# Altium PCB AdapterPlate.PcbDoc
Units mm, origin at the board's own origin, x right, y up, seen from the top; angles counter-clockwise.
Board outline 22 x 22 mm, 2 copper layers (Top Layer, Bottom Layer); 2 components, 13 nets, 27 pads, 0 vias.
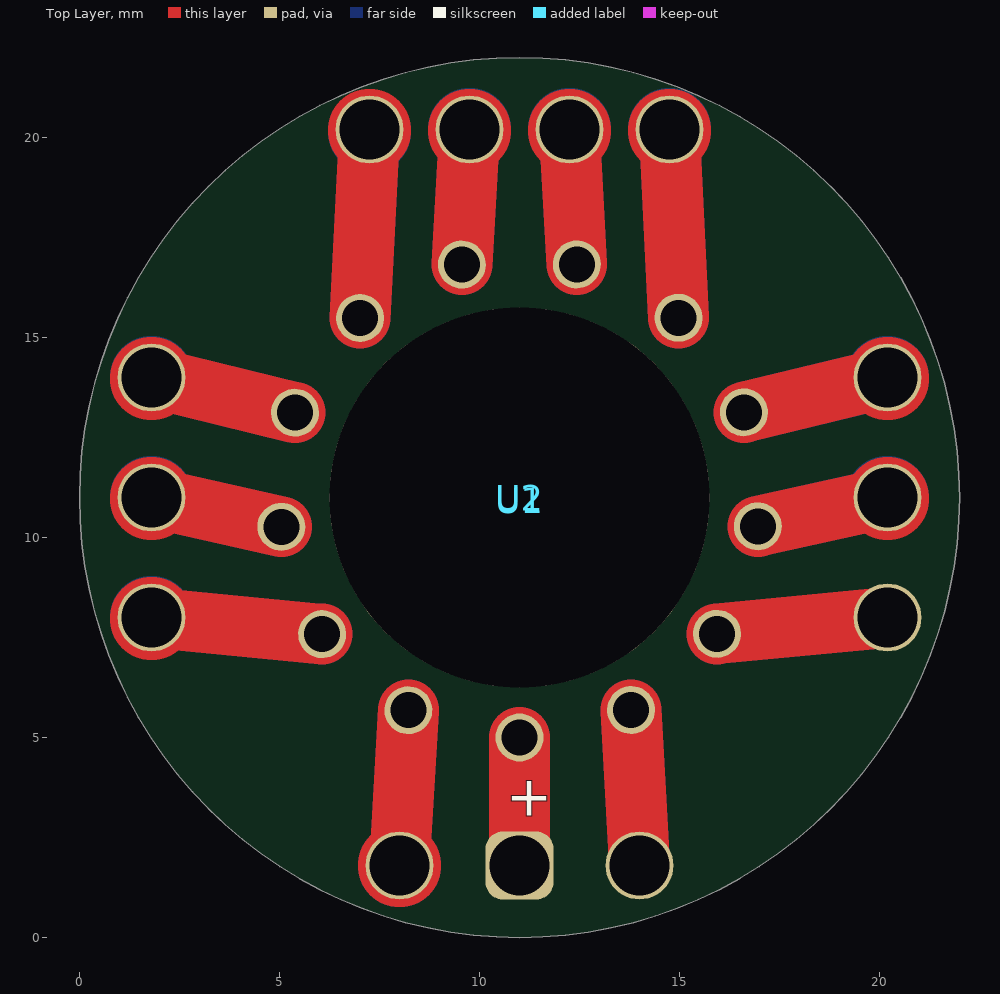
[diagram p0: Top Layer view]
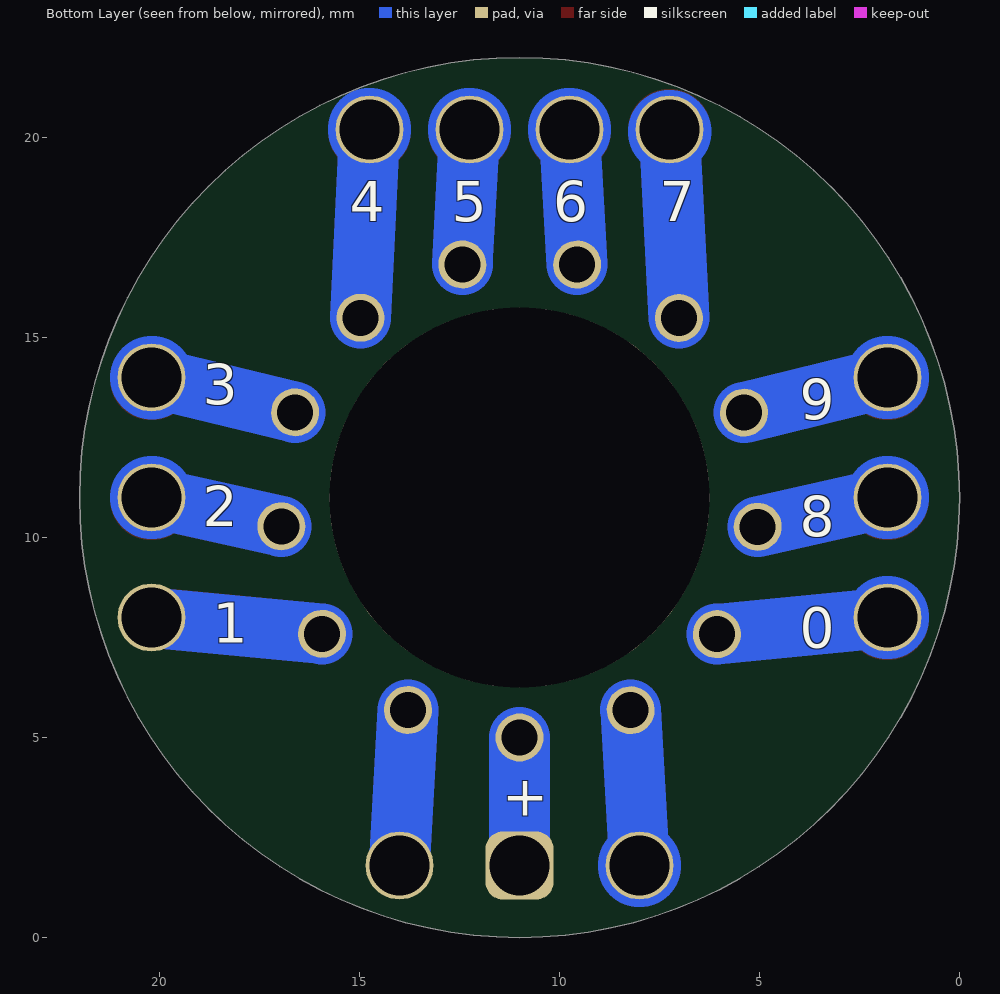
[diagram p1: Bottom Layer view, seen from below]

## Layer stack, top to bottom
Top Solder: solder mask 0.0102, Solder Resist, Dk 3.5
Top Layer: signal copper 0.0356
Dielectric 1: dielectric 0.32, FR-4, Dk 4.8
Bottom Layer: signal copper 0.0356
Bottom Solder: solder mask 0.0102, Solder Resist, Dk 3.5

## Board outline
11,0 cw(c11,11) 0,11 cw(c11,11) 11,22 cw(c11,11) 22,11 cw(c11,11)

## Design rules (kind name [scope] priority, off if disabled: settings)
Clearance [All] p1: gap=0.152 ignorepadtopadclearanceinfootprint=FALSE
ComponentClearance [All] p1 off: gap=0.254 collisioncheckmode=3 verticalgap=0.254 showdistances=FALSE
Height [All] p1 off: minheight=0 maxheight=25.4 prefheight=12.7
PolygonConnect [All] p1: connectstyle=Relief reliefconductorwidth=0.254 reliefentries=4 polygonreliefangle="90 Angle" airgapwidth=0.254
RoutingVias [All] p1: holewidth=0.711 width=1.27 viastyle="Through Hole" minholewidth=0.711 minwidth=1.27 maxholewidth=0.711 maxwidth=1.27
SolderMaskExpansion [All] p1: expansion=0.102
Width [All] p1: maxlimit=2.54 minlimit=0.254 preferedwidth=1.27
28 further rules are at their usual default settings.

## Components (designator, comment, footprint, x,y, rotation, side; value= is the part's Value field where it differs from the comment)
U1 "NH_14" NH_14 11,11 r0 top
U2 "NH_14_PIN" NH_14_PIN 11,11 r0 top

## Footprints (in the part's own frame and the unit in brackets; to place one, negate y for a bottom-side part, rotate by r counter-clockwise, add the part's x,y. Pads: shape width x height; smd on the part's side, far side on the other; paste and mask are expansions set on the pad)
NH_14 [mm]
  round 1.2 hole 0.9: 0(-4.933,-3.416) 1(4.939,-3.407) 2(5.957,-0.721) 3(5.609,2.131) 4(3.976,4.494) 5(1.431,5.827) 6(-1.441,5.824) 7(-3.984,4.487) 8(-5.613,2.121) 9(-5.955,-0.731) +(0,-6) D1(-2.78,-5.317) D2(2.789,-5.312)
NH_14_PIN [mm]
  round 1.7 hole 1.5: 0(-9.2,-3) 1(9.2,-3) 2(9.2,0) 3(9.2,3) 4(3.75,9.2) 5(1.25,9.2) 6(-1.25,9.2) 7(-3.75,9.2) 8(-9.2,3) 9(-9.2,0) D1(-3,-9.2) D2(3,-9.2)
  rrect50% 1.7x1.7 hole 1.5: +(0,-9.2)

## Free pads (board coordinates)
  round 9.5 hole 9.5: 8(11,11)

## Nets (pads, with @x,y where several pads share a name; then routed paths per layer and width w, separated by ;. In a path a pad name is that pad's centre, name@x,y a point inside that pad or via, vN(x,y) a via of type N, cw(c..) or ccw(c..) an arc to the next point about the centre after c; other vN are vias at no path point)
0: U1.0 U2.0 | length 8.9
  Top Layer w1.524: U2.0 1.829,7.997 U1.0
  Top Layer w2.032: U2.0@1.827,7.975 ccw(c1.801,7.975) U2.0@1.827,7.975
  Bottom Layer w1.524: U2.0@1.829,7.997 U1.0
  Bottom Layer w2.032: U2.0@1.825,8 ccw(c1.8,8) U2.0@1.825,8
1: U1.1 U2.1 | length 8.6
  Top Layer w1.524: U1.1 20.198,8 U2.1
  Bottom Layer w1.524: U1.1 20.175,7.998 U2.1@20.198,8
2: U1.2 U2.2 | length 7
  Top Layer w1.524: U1.2 20.192,10.998 U2.2
  Top Layer w2.032: U2.2@20.192,10.998 cw(c20.201,10.975) U2.2 cw(c20.201,10.975) 20.227,10.975 cw(c20.201,10.975) U2.2@20.192,10.998
  Bottom Layer w1.524: U1.2 20.167,10.993 U2.2@20.192,10.998
  Bottom Layer w2.032: U2.2@20.217,10.998 ccw(c20.192,10.998) U2.2@20.217,10.998
3: U1.3 U2.3 | length 7.7
  Top Layer w1.524: U1.3 20.191,13.998 U2.3
  Top Layer w2.032: U2.3@20.227,13.975 ccw(c20.201,13.975) U2.3@20.227,13.975
  Bottom Layer w1.524: U1.3 20.166,13.992 U2.3@20.191,13.998
  Bottom Layer w2.032: U2.3@20.216,13.998 ccw(c20.191,13.998) U2.3@20.216,13.998
4: U1.4 U2.4 | length 9.7
  Top Layer w1.524: U2.4 14.752,20.149 U1.4
  Top Layer w2.032: U2.4@14.777,20.175 ccw(c14.751,20.175) U2.4@14.777,20.175
  Bottom Layer w1.524: U2.4@14.752,20.149 U1.4
  Bottom Layer w2.032: U2.4@14.775,20.2 ccw(c14.75,20.2) U2.4@14.775,20.2
5: U1.5 U2.5 | length 7
  Top Layer w1.524: U2.5 12.253,20.149 U1.5
  Top Layer w2.032: U2.5@12.277,20.175 ccw(c12.251,20.175) U2.5@12.277,20.175
  Bottom Layer w1.524: U2.5@12.253,20.149 U1.5
  Bottom Layer w2.032: U2.5@12.275,20.2 ccw(c12.25,20.2) U2.5@12.275,20.2
6: U1.6 U2.6 | length 7
  Top Layer w1.524: U1.6 9.747,20.15 U2.6
  Top Layer w2.032: U2.6@9.777,20.175 ccw(c9.751,20.175) U2.6@9.777,20.175
  Bottom Layer w1.524: U1.6 U2.6@9.747,20.15
  Bottom Layer w2.032: U2.6@9.775,20.2 ccw(c9.75,20.2) U2.6@9.775,20.2
7: U1.7 U2.7 | length 9.7
  Top Layer w1.524: U1.7 7.247,20.15 U2.7
  Top Layer w2.032: U2.7@7.277,20.175 ccw(c7.251,20.175) U2.7@7.277,20.175
  Bottom Layer w1.524: U1.7 7.246,20.124 U2.7@7.247,20.15
  Bottom Layer w2.032: U2.7@7.273,20.15 ccw(c7.247,20.15) U2.7@7.273,20.15
8: U1.8 U2.8 | length 7.7
  Top Layer w1.524: U2.8 1.814,13.996 1.831,13.992 U1.8
  Top Layer w2.032: U2.8 ccw(c1.801,13.975) 1.827,13.975 ccw(c1.801,13.975) 1.814,13.996 ccw(c1.801,13.975) U2.8
  Bottom Layer w1.524: U2.8@1.831,13.992 U1.8
  Bottom Layer w2.032: U2.8@1.825,14 ccw(c1.8,14) U2.8@1.825,14
9: U1.9 U2.9 | length 6.9
  Top Layer w1.524: U2.9 1.814,10.997 1.831,10.993 U1.9
  Top Layer w2.032: U2.9 ccw(c1.801,10.975) 1.827,10.975 ccw(c1.801,10.975) 1.814,10.997 ccw(c1.801,10.975) U2.9
  Bottom Layer w1.524: U2.9@1.831,10.993 U1.9
  Bottom Layer w2.032: U2.9@1.825,11 ccw(c1.8,11) U2.9@1.825,11
+: U1.+ U2.+ | length 6.4
  Top Layer w1.524: U2.+ 11,1.825 U1.+
  Bottom Layer w1.524: U2.+@11,1.825 11,1.851 U1.+
D1: U1.D1 U2.D1 | length 8
  Top Layer w1.27: U2.D1 U2.D1@8.007,1.919
  Top Layer w1.524: U2.D1@8.007,1.919 U1.D1
  Top Layer w2.032: U2.D1@8.025,1.8 ccw(c8,1.8) U2.D1@8.025,1.8
  Bottom Layer w1.524: U2.D1@8.007,1.919 U1.D1
  Bottom Layer w2.032: U2.D1@8.025,1.8 ccw(c8,1.8) U2.D1@8.025,1.8
D2: U1.D2 U2.D2 | length 7.8
  Top Layer w1.524: U1.D2 13.999,1.825 U2.D2
  Bottom Layer w1.524: U1.D2 13.997,1.851 U2.D2@13.999,1.825

## Other copper
Top Layer:
  region: 4.953,4.699

## Silkscreen, mask and mechanical layers (free items; w line width, h text height)
Top Overlay:
  text "+" at 10.668,3.048 h1
Bottom Overlay:
  text "7" at 7.493,17.907 h1
  text "6" at 10.16,17.907 h1
  text "5" at 12.7,17.907 h1
  text "4" at 15.24,17.907 h1
  text "3" at 18.923,13.335 h1
  text "9" at 4,12.954 h1
  text "2" at 18.923,10.287 h1
  text "8" at 4,10.033 h1
  text "1" at 18.669,7.366 h1
  text "0" at 4,7.239 h1
  text "+" at 11.43,3.048 h1
Mechanical 1:
  circle w0.254: c11,11 r11